# Altium PCB ALTAIR_PD_Soldier_V26.4c.PcbDoc (part 3 of 4)
Units mm, origin at the board's own origin, x right, y up, seen from the top; angles counter-clockwise.
Board outline 74 x 56 mm, 4 copper layers (Top Layer, Layer 1, Layer 2, Bottom Layer), stack 1.675 mm thick; 209 components, 127 nets, 625 pads, 468 vias.
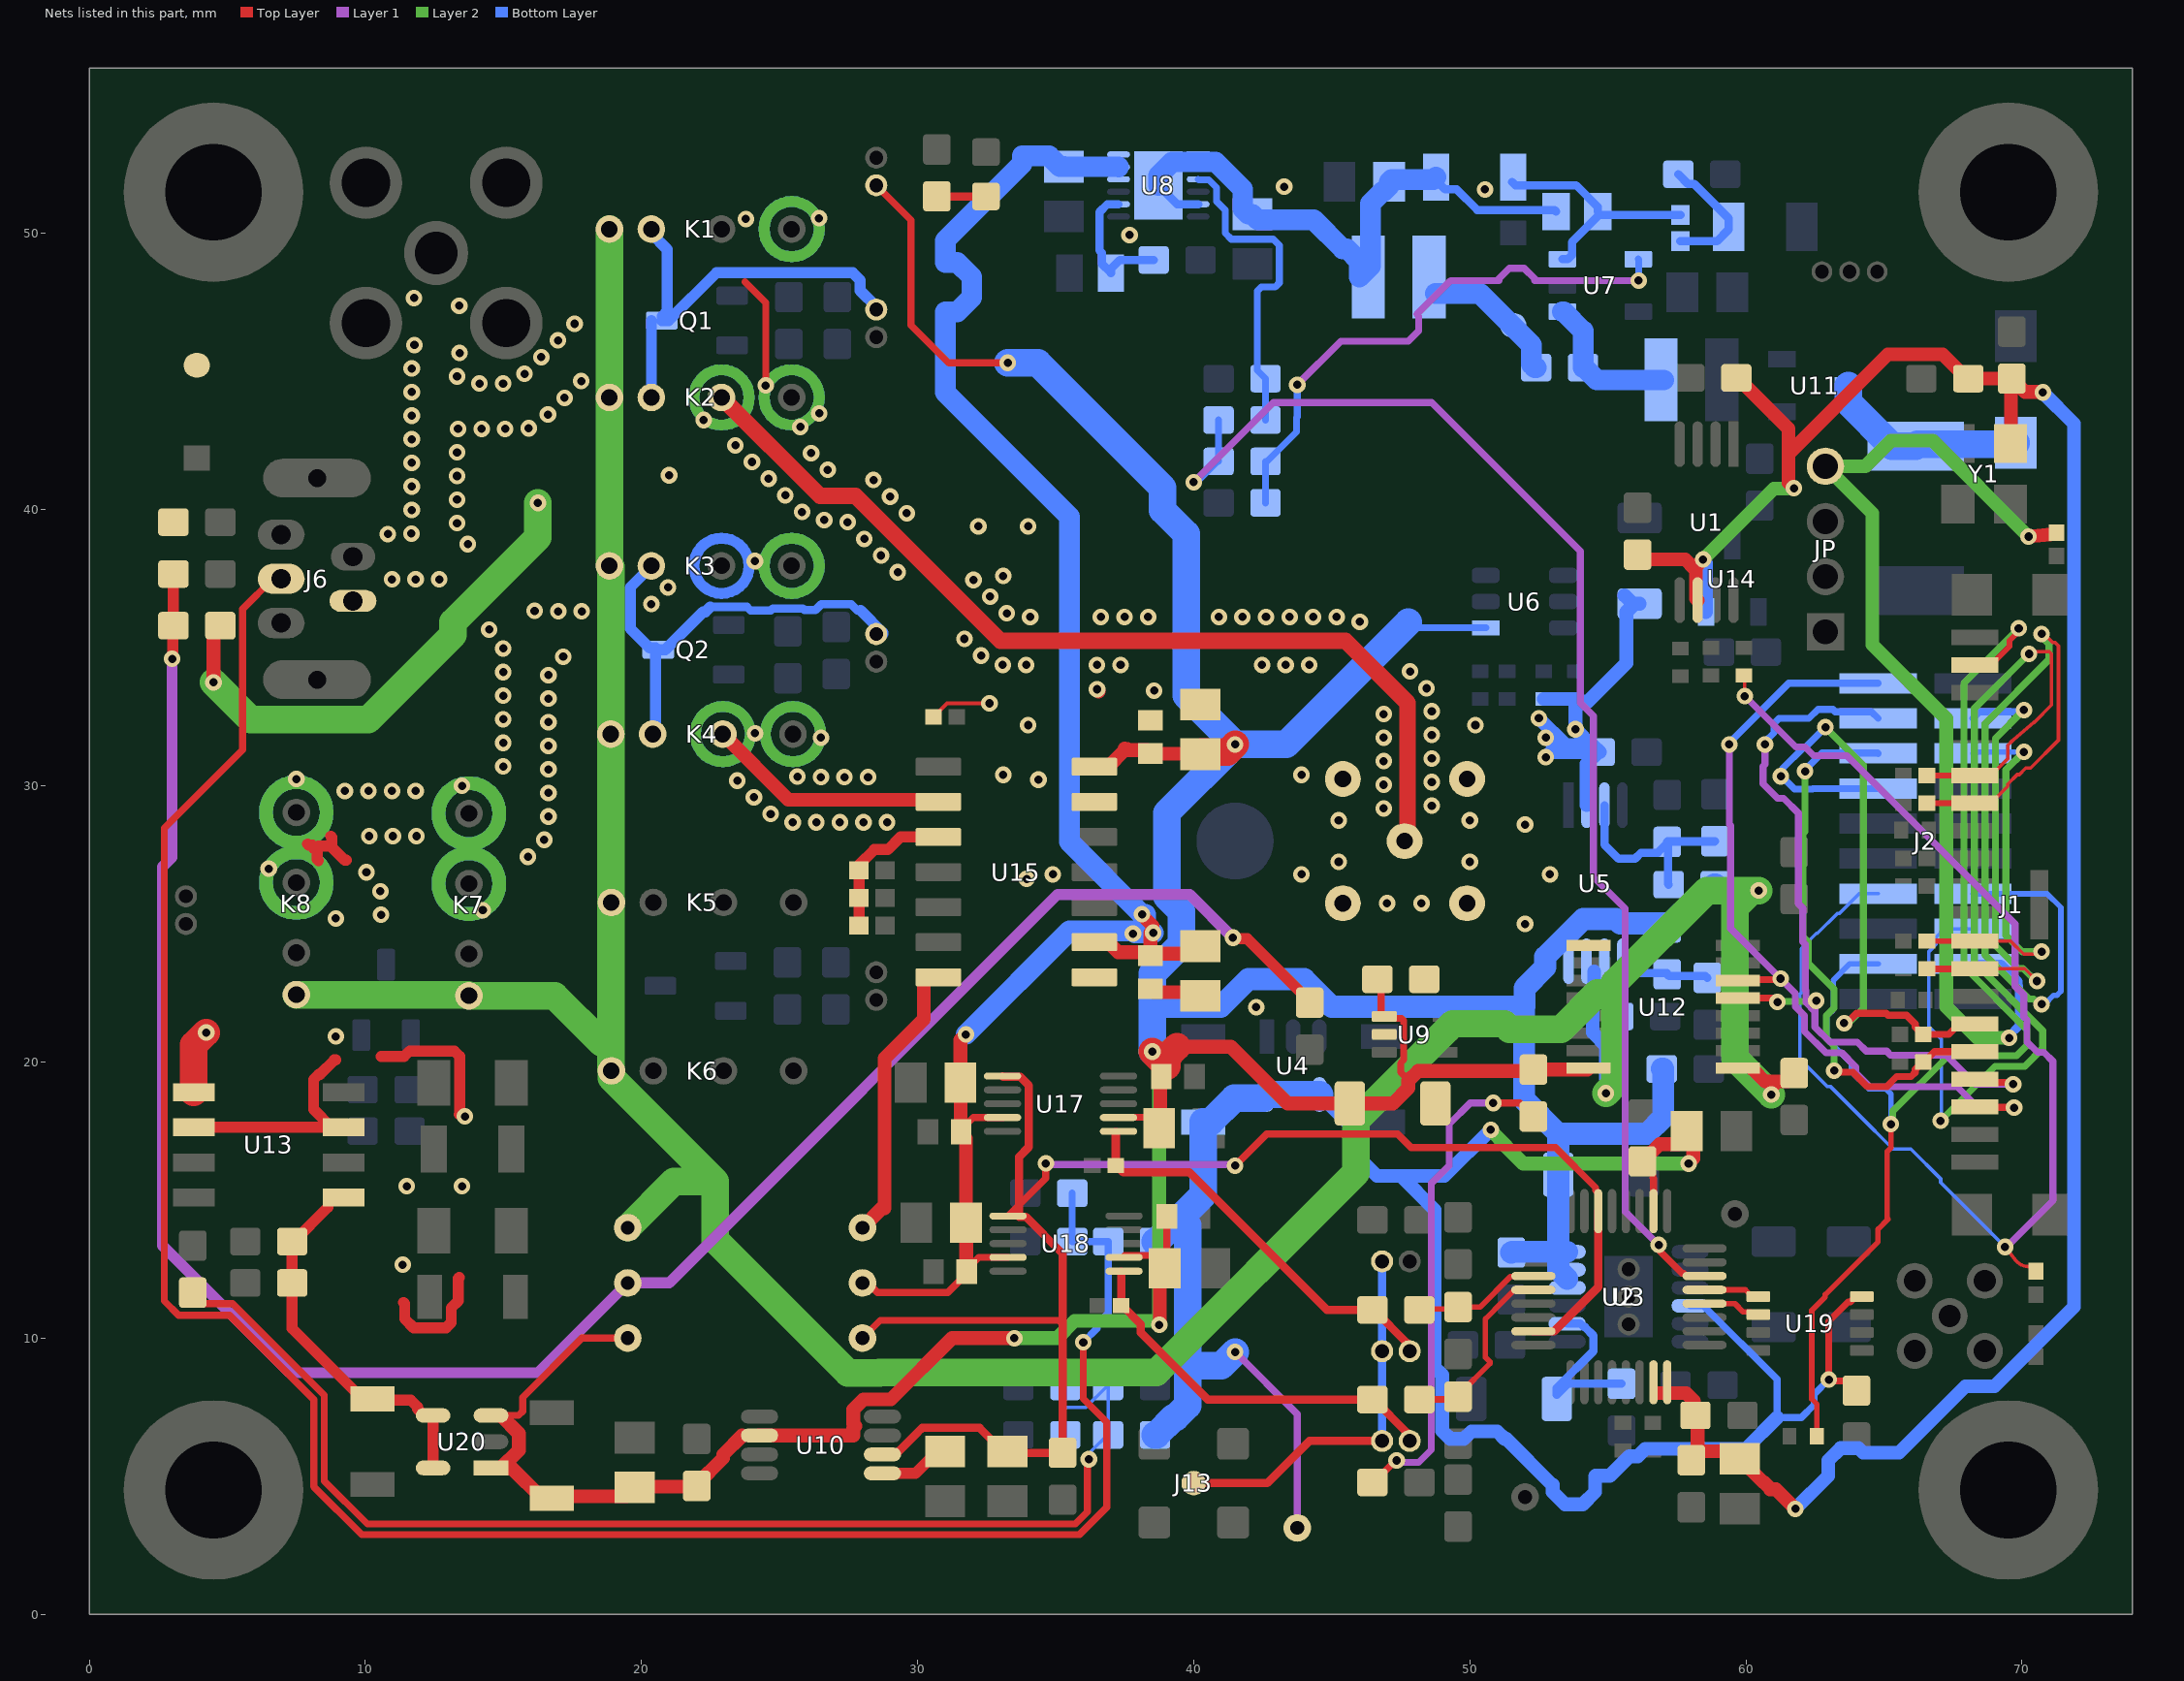
[diagram p4: the nets of this part, all layers, seen from the top]

## Via types
v1: diameter 0.6, hole 0.3, Top Layer to Bottom Layer, 322 vias
v2: diameter 0.8, hole 0.5, Top Layer to Bottom Layer, 122 vias
v3: diameter 0.6, hole 0.3, Top Layer to Bottom Layer, tented both sides, 24 vias

## Nets (pads, with @x,y where several pads share a name; then routed paths per layer and width w, separated by ;. In a path a pad name is that pad's centre, name@x,y a point inside that pad or via, vN(x,y) a via of type N, cw(c..) or ccw(c..) an arc to the next point about the centre after c; other vN are vias at no path point) (continued)
IVC_CAPLINK: R58.1 R59.1 R60.1 U15.3 | length 5.5
  Top Layer w0.4: R60.1@27.875,24.941 27.875,27.137 28.431,27.693 28.923,27.693 29.381,28.151 U15.3@30.75,28.151
IVC_LVLAMP_OUT: JIVC.1 R63.2 R75.1 U18.6 | length 14
  Top Layer w0.3: U18.6@37.375,12.4 R63.2@37.375,11.185 37.4,11.185 38.08,10.505 38.08,10.202 40.503,7.779 R75.1@46.471,7.779 46.521,7.779 47.725,6.575 47.725,6.375 JIVC.1@47.821,6.279
IVC_RELAY_GND: J11.2 K3.2 K4.2 Q2.3 | length 16.4
  Bottom Layer w0.3: 22.494,36.483 23.82,36.483 23.945,36.358 24.619,36.358 24.689,36.358 24.758,36.427 25.842,36.427 25.902,36.367 26.298,36.367 26.508,36.577 27.592,36.577 27.811,36.358 27.931,36.358
  Bottom Layer w0.4: K3.2@20.358,37.971 20.358,37.954 19.589,37.184 19.589,35.699 20.288,35 Q2.3@20.5,35 ; K4.2@20.405,31.874 20.506,31.975 20.506,34.931 Q2.3@20.506,34.994 ; Q2.3@20.607,34.931 20.857,34.931 22.226,36.3 22.311,36.3 22.494,36.483 ; 27.931,36.358 28.75,35.539 J11.2@28.75,35.5
IVC_SW_1_Sol: J1.17 J2.03 U12.5 | length 29.1
  Top Layer w0.254: U12.5@59.7,22.317 60.997,22.317 v1(61.142,22.173) ; J1.17@68.291,19.375 68.4,19.266 69.61,19.266 v1(69.676,19.199)
  Layer 1 w0.254: v1(60.69,31.5) 60.69,30.779 60.617,30.706 60.617,30.079 61.148,29.549 61.366,29.549 61.897,29.018 61.897,25.729 62.055,25.571 62.055,24.36 62.147,24.268 62.147,22.622 62.17,22.599 62.17,22.167 62.5,21.837 ; v1(62.542,22.222) 62.5,22.18 62.5,21.837 ; v1(69.676,19.199) 68.301,19.199 67.25,20.25 65.238,20.25 65.091,20.397 64.353,20.397 64.03,20.72 63.047,20.72 62.5,21.266 62.5,21.837
  Layer 2 w0.254: v1(61.142,22.173) 61.166,22.197 62.518,22.197 v1(62.542,22.222)
  Bottom Layer w0.127: v1@69.611,19.199 v1(69.676,19.199)
  Bottom Layer w0.254: v1(60.69,31.5) 60.69,31.594 61.015,31.919 61.015,32.265 61.195,32.445 62.28,32.445 62.607,32.772 63.143,32.772 63.229,32.686 64.545,32.686 J2.03@64.786,32.445
IVC_SW_2_Sol: J1.18 J2.01 U12.6 | length 29.8
  Top Layer w0.254: U12.6@59.7,22.952 59.734,22.986 61.219,22.986 v1(61.253,23.02) ; J1.18@68.291,18.375 68.305,18.361 69.695,18.361 v1(69.71,18.346)
  Layer 1 w0.254: v1(59.396,31.5) 59.396,28.603 59.44,28.559 59.44,24.832 61.172,23.1 61.333,23.1 61.366,23.068 61.366,22.907 61.789,22.484 61.789,22.01 62.119,21.679 62.119,21.109 62.889,20.339 63.46,20.339 63.971,19.827 63.971,19.614 64.482,19.103 67.647,19.103 68.404,18.346 v1(69.71,18.346)
  Bottom Layer w0.127: v1@69.709,18.347 v1(69.71,18.346)
  Bottom Layer w0.254: v1(59.396,31.5) 59.396,31.561 61.55,33.715 J2.01@64.786,33.715
IVC_SW_IN: K4.3 U15.2 | length 8.8
  Top Layer w0.5: K4.3@22.945,31.874 25.319,29.5 U15.2@30.75,29.5
MMCX_Testcon: J13.1 JACF.2 JIVC.2 JTIA.2 | length 14
  Top Layer w0.3: J13.1@40,4.75 42.658,4.75 44.187,6.279 JIVC.2@46.821,6.279
  Bottom Layer w0.3: JIVC.2@46.821,6.279 JACF.2@46.821,9.529 JTIA.2@46.821,12.779
NEG_SW: R19.2 R20.2 U2.22 | length 48.7
  Top Layer w0.254: v1(56.837,13.377) 56.903,13.311 56.903,13.126 57.683,12.346 57.742,12.346 57.838,12.25 U2.22@58.5,12.25
  Layer 1 w0.254: v1(40,41) 42.881,43.881 48.619,43.881 54,38.5 54,33.008 54.472,32.536 54.472,26.71 55.627,25.555 55.627,14.587 v1(56.837,13.377)
  Bottom Layer w0.254: v1(40,41) 40.066,41.066 40.166,41.066 40.85,41.75 R20.2@40.9,41.75 R19.2@40.9,43.25
NetC00_2: C00.2 R0.1 R33.1 TP7.1 | length 76.7
  Top Layer w0.4: v1(3,34.6) 3.024,34.624 C00.2@3.024,35.777 ; C00.2@3.047,35.801 R0.1@3.047,37.676 ; v1(41.417,24.503) 41.456,24.465 41.935,24.465 44.2,22.2 R33.1@44.2,22.15
  Layer 1 w0.4: v1(3,34.6) 3,27.419 2.646,27.065 2.646,13.354 7.25,8.75 16.25,8.75 TP7.1@19.5,12 21,12 35.07,26.07 39.85,26.07 v1(41.417,24.503)
NetC3_2: C3.2 R15.2 U3.8 | length 6.3
  Bottom Layer w0.3: U3.8@53.525,10.525 54.004,10.525 54.127,10.402 54.168,10.402 54.477,10.093 54.477,9.527 53.15,8.2 53.15,7.95 53.55,8.35 R15.2@55.5,8.35
NetC7_1: C7.1 U10.5 | length 2
  Top Layer w0.4: U10.5@28.725,5.108 29.925,5.108 C7.1@30.5,5.683
NetC10_2: C10.2 R21.1 R22.2 U5.5 | length 5.6
  Bottom Layer w0.3: C10.2@55.375,21.65 55.51,21.785 55.51,23.634 U5.5@55.525,23.65 55.525,23.262 55.562,23.225 R21.1@57.15,23.225 ; R21.1@57.15,23.175 57.212,23.113 58.538,23.113 R22.2@58.6,23.05
NetC11_2: C11.2 R23.1 R24.2 U5.3 | length 7.5
  Bottom Layer w0.3: U5.3@54.875,29.3 54.875,27.872 55.383,27.365 55.986,27.365 56.2,27.579 56.8,27.579 57.15,27.929 C11.2@57.15,27.975 ; R23.1@57.2,26.425 57.175,26.45 57.175,27.95 C11.2@57.15,27.975 ; R24.2@58.875,28 58.862,27.988 57.162,27.988 C11.2@57.15,27.975
NetC15_1: C15.1 L1.2 U7.1 | length 5.4
  Bottom Layer w0.75: U7.1@53.35,47.175 53.4,47.175 54.1,46.475 C15.1@54.1,45.15 ; C15.1@54.15,45.15 54.6,44.7 L1.2@57.024,44.7
NetC15_2: C15.2 D1.2 L2.1 | length 5.2
  Bottom Layer w0.75: L2.1@48.75,47.836 50.364,47.836 51.454,46.746 51.454,46.741 52.225,45.97 52.225,45.275 52.35,45.15 C15.2@52.4,45.15
NetC16_2: C16.2 R29.1 R30.2 U7.3 | length 8.7
  Bottom Layer w0.3: C16.2@51.525,51.875 51.648,51.752 53.848,51.752 54.625,50.975 R29.1@54.625,50.8 ; U7.3@53.35,49.075 53.55,49.075 53.7,49.225 53.7,49.7 R29.1@54.625,50.625 ; R29.1@54.746,50.679 R30.2@57.625,50.679
NetC17_1: C17.1 R30.1 R31.2 | length 4.8
  Bottom Layer w0.3: C17.1@57.55,52.15 57.9,51.8 58.125,51.8 59.375,50.55 R31.2@59.375,50.25 59.375,50.146 58.95,49.721 R30.1@57.625,49.721
NetC21_1: C21.1 R32.1 U8.8 | length 5
  Bottom Layer w0.3: U8.8@37.278,51.067 36.875,51.067 36.586,50.778 36.586,49.389 36.675,49.3 36.675,48.9 C21.1@37,48.575 37,48.725 37.325,49.05 R32.1@38.55,49.05
NetC32_2: C32.2 R49.1 R50.2 R51.1 RT1.2 | length 46.6
  Top Layer w0.254: RT1.2@3.75,11.65 3.75,11.619 4.123,11.246 5.195,11.246 8.512,7.929 8.512,4.829 10.07,3.271 35.707,3.271 36.148,3.712 36.148,5.562 v1(36.202,5.616)
  Bottom Layer w0.127: R49.1@35.35,6.5 35.25,6.6 35.25,7.426 ; R50.2@35.35,8.25 35.25,8.15 35.25,7.426 ; v1(36.202,5.616) 36.293,5.707 36.293,5.91 36.883,6.5 R51.1@36.9,6.5 C32.2@36.9,8.25 36.85,8.25 36.1,7.5 35.324,7.5 35.25,7.426
NetD2_2: D2.2 R18.1 | length 1.8
  Top Layer w0.3: R18.1@30.696,51.35 D2.2@32.475,51.35
NetD4_1: D4.1 F1.2 U11.3 | length 7.4
  Bottom Layer w1: U11.3@63.7,44.5 63.7,43.895 65.29,42.305 F1.2@66.15,42.305 66.211,42.366 69.712,42.366 D4.1@69.773,42.427
NetJ6_3: J6.3 R44.1 R47.1 R48.2 | length 81.4
  Top Layer w0.254: J6.3@6.95,37.5 6.65,37.5 5.551,36.401 5.551,31.305 2.719,28.473 2.719,11.345 3.238,10.826 5.076,10.826 8.131,7.771 8.131,4.619 9.86,2.89 35.865,2.89 36.849,3.875 36.849,6.958 36,7.807 v1(36,9.853)
  Bottom Layer w0.254: R47.1@35.6,15.25 R48.2@35.6,13.5 R44.1@36.9,13.5 36.9,10.9 36.498,10.498 36.498,10.351 v1(36,9.853)